# EAGLE board PSprogramboard (EAGLE 7.2.0)
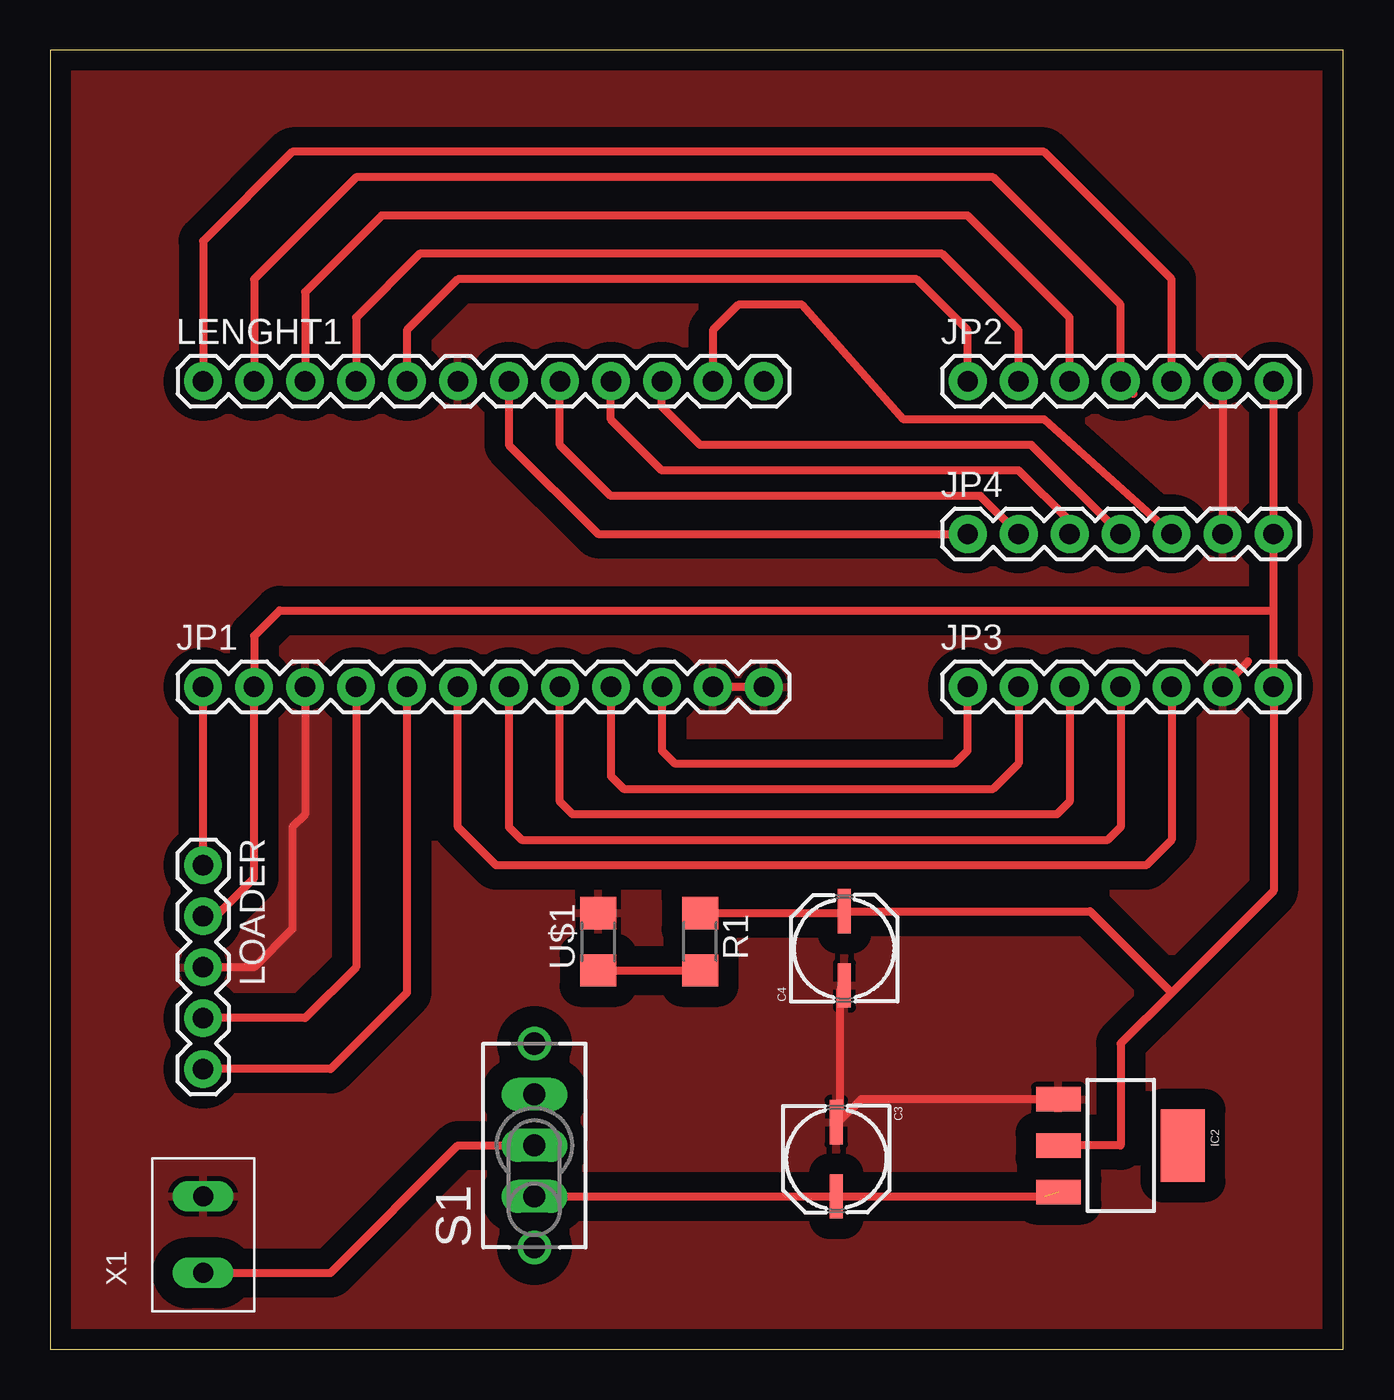
[diagram p0: board, top side]

Size 64.44 x 64.76 mm. Coordinates in mm from the lower left corner, seen from the top.
Outline: 0,0 64.44,0 64.44,64.76 0,64.76 0,0
Copper layers (1*16): Top 0.035mm / dielectric 1.5mm / Bottom 0.035mm
Design rules "default": minimum track width 10mil, minimum drill 24mil, track to track 8mil, track to pad 8mil, pad to pad 8mil, via to via 8mil, smd to smd 8mil, copper to edge 40mil, drill to drill 8mil, minimum pad ring 10mil, minimum via ring 8mil, stop-mask expansion 4mil, vias tented up to drill 0mil, thermal gap 10mil
Net classes: 1 power: width 0.406 mm, clearance 1.016 mm; 2 signal: width 0.203 mm, clearance 0.406 mm

## Footprints (pad centres in the part's own frame; a part is rotated, then mirrored left to right if it is on the bottom)
PANASONIC_C = smd 2.2 x 0.65: + 1.9,-0.2; - -1.8,-0.2
SOT223 = smd 1.219 x 2.235: 1 -2.311,-3.099; 2 0,-3.099; 3 2.311,-3.099 | smd 3.6 x 2.2: 4 0,3.099
1X12 = drill 1.016 pad 1.88: 1 0,0; 2 2.54,0; 3 5.08,0; 4 7.62,0; 5 10.16,0; 6 12.7,0; 7 15.24,0; 8 17.78,0; 9 20.32,0; 10 22.86,0; 11 25.4,0; 12 27.94,0
1X07 = drill 1.016 pad 1.88: 1 0,0; 2 2.54,0; 3 5.08,0; 4 7.62,0; 5 10.16,0; 6 12.7,0; 7 15.24,0
1X05 = drill 1.016 pad 1.88: 1 0,0; 2 2.54,0; 3 5.08,0; 4 7.62,0; 5 10.16,0
1206 = smd 1.6 x 1.803: 1 -1.422,0; 2 1.422,0
TL3XYO = drill 1.1 pad 1.422 long: 1 -2.54,0; 2 0,0; 3 2.54,0 | drill 1.1 pad 1.676: M1 -5.08,0; M2 5.08,0
22-23-2021 = drill 1 long: 1 -1.905,0; 2 1.905,0

## Placement (x,y rotation side)
C3  [PANASONIC_C]  39.37,9.52 270 top
C4  [PANASONIC_C]  39.37,19.94 90 top
IC2  [SOT223]  53.34,10.16 270 top
JP1  M12PTH  [1X12]  7.62,33.02 0 top
JP2  [1X07]  45.72,48.26 0 top
JP3  [1X07]  45.72,33.02 0 top
JP4  [1X07]  45.72,40.64 0 top
LENGHT1  M12PTH  [1X12]  7.62,48.26 0 top
LOADER  [1X05]  7.62,24.13 270 top
R1  180  [1206]  32.38,20.32 270 top
S1  TL36YO  [TL3XYO]  24.13,10.16 90 top
U$1  [1206]  27.3,20.32 90 top
X1  22-23-2021  [22-23-2021]  7.62,5.71 90 top

## Library data of the parts
C3 C4 IC2 JP1-JP4 LENGHT1 LOADER = 01_SparkFun
R1 U$1 = 01_FAB_Hello
S1 = switch
X1 = con-molex; MF: MOLEX; MPN: 22-23-2021; OC_FARNELL: 1462926; OC_NEWARK: 25C3832

## Nets
GND [power]: C3.- C4.- IC2.1 JP1.3 JP1.11 JP1.12 JP2.6 JP3.6 JP4.6 LENGHT1.6 LOADER.3 U$1.2 X1.2
N$1: JP2.1 LENGHT1.5
N$2: JP1.10 JP3.1
N$3: S1.2 X1.1
N$4: JP1.9 JP3.2
N$5: JP1.8 JP3.3
N$6: JP2.2 LENGHT1.4
N$7: JP2.3 LENGHT1.3
N$8: JP1.7 JP3.4
N$9: C3.+ IC2.3 S1.1
N$10: JP2.4 LENGHT1.2
N$11: JP4.1 LENGHT1.7
N$12: JP2.5 LENGHT1.1
N$13: JP1.6 JP3.5
N$14: R1.2 U$1.1
N$15: JP4.2 LENGHT1.8
N$16: JP4.3 LENGHT1.9
N$17: JP4.4 LENGHT1.10
N$18: JP4.5 LENGHT1.11
RST: JP1.1 LOADER.1
RX: JP1.4 LOADER.4
TX: JP1.5 LOADER.5
VCC [power]: C4.+ IC2.2 JP1.2 JP2.7 JP3.7 JP4.7 LOADER.2 R1.1

## Tracks (layer width: path | path; a pad name or v marks a point on that pad's centre or on a via)
GND
  Top 0.406: JP1.3 12.7,26.67 12.07,26.03 12.07,20.95 10.16,19.05 LOADER.3 | JP1.12 JP1.11 | JP2.6 JP4.6 58.9,40.16 | JP3.6 59.69,34.29 | IC2.1 40.41,12.47 39.37,11.43 39.37,17.94 C4.-
  pour Top: 0,64.77 64.77,64.14 64.77,0 0,0
N$1
  Top 0.406: JP2.1 45.72,50.8 43.18,53.34 20.32,53.34 17.78,50.8 LENGHT1.5
N$2
  Top 0.406: JP1.10 30.48,29.84 31.12,29.21 45.09,29.21 45.72,29.84 JP3.1
N$3
  Top 0.406: S1.2 20.32,10.16 13.97,3.81 X1.1
N$4
  Top 0.406: JP1.9 27.94,28.58 28.58,27.94 46.99,27.94 48.26,29.21 JP3.2
N$5
  Top 0.406: JP3.3 50.8,27.3 50.16,26.67 26.04,26.67 25.4,27.3 JP1.8
N$6
  Top 0.406: JP2.2 48.26,50.8 44.45,54.61 18.41,54.61 15.24,51.44 LENGHT1.4
N$7
  Top 0.406: JP2.3 50.8,51.44 45.72,56.52 16.51,56.52 12.7,52.7 LENGHT1.3
N$8
  Top 0.406: JP1.7 22.86,26.03 23.49,25.4 52.71,25.4 53.34,26.03 JP3.4
N$9  (1 unrouted)
  Top 0.406: S1.1 C3.+ 49.52,7.62 49.53,7.62
N$10
  Top 0.406: 53.98,47.62 JP2.4 53.34,52.07 46.99,58.42 15.24,58.42 10.16,53.34 LENGHT1.2
N$11
  Top 0.406: LENGHT1.7 22.86,45.09 27.3,40.64 JP4.1
N$12
  Top 0.406: JP2.5 55.88,53.34 49.53,59.69 12.07,59.69 7.62,55.25 LENGHT1.1
N$13
  Top 0.406: JP3.5 55.88,25.4 54.61,24.13 22.23,24.13 20.32,26.03 JP1.6
N$14
  Top 0.406: U$1.1 R1.2
N$15
  Top 0.406: JP4.2 46.35,42.55 27.94,42.55 25.4,45.09 LENGHT1.8
N$16
  Top 0.406: LENGHT1.9 27.94,46.35 30.48,43.81 48.26,43.81 50.8,41.27 JP4.3
N$17
  Top 0.406: JP4.4 48.9,45.09 32.38,45.09 30.48,46.99 LENGHT1.10
N$18
  Top 0.406: JP4.5 49.53,46.35 42.55,46.35 37.47,52.07 34.29,52.07 33.02,50.8 LENGHT1.11 33.02,47.62
RST
  Top 0.406: LOADER.1 JP1.1
RX
  Top 0.406: LOADER.4 12.7,16.51 15.24,19.05 JP1.4
TX
  Top 0.406: LOADER.5 13.97,13.97 17.78,17.78 JP1.5
VCC
  Top 0.406: 55.88,17.78 60.96,22.86 JP3.7 60.96,36.83 | 55.88,17.78 53.34,15.24 53.34,10.16 IC2.2 49.53,10.16 | 55.88,17.78 51.82,21.84 C4.+ 39.47,21.74 R1.1 | 60.96,36.83 JP4.7 JP2.7 | LOADER.2 8.25,21.59 10.16,23.49 JP1.2 10.16,35.56 11.43,36.83 60.96,36.83